# Altium PCB DIOT_Sampler_Adapter 20 mm spacing.PCBDOC
Units mm, origin at the board's own origin, x right, y up, seen from the top; angles counter-clockwise.
Board outline 35.9 x 100 mm, 4 copper layers (Top, GP1(GND), L3, Bot), stack 1.648 mm thick; 8 components, 21 nets, 58 pads, 0 vias.
Unrouted connection lines stored in the file: 14.
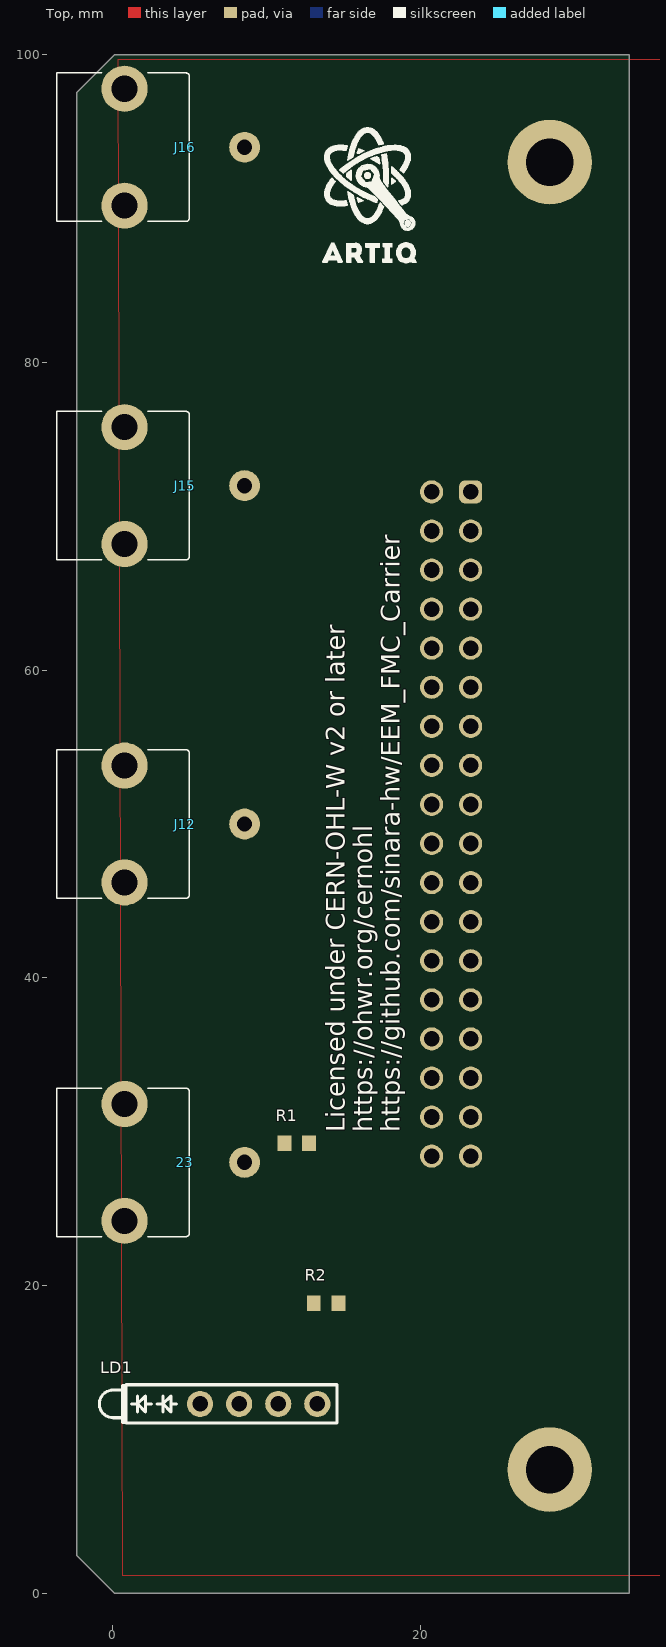
[diagram p0: Top view]
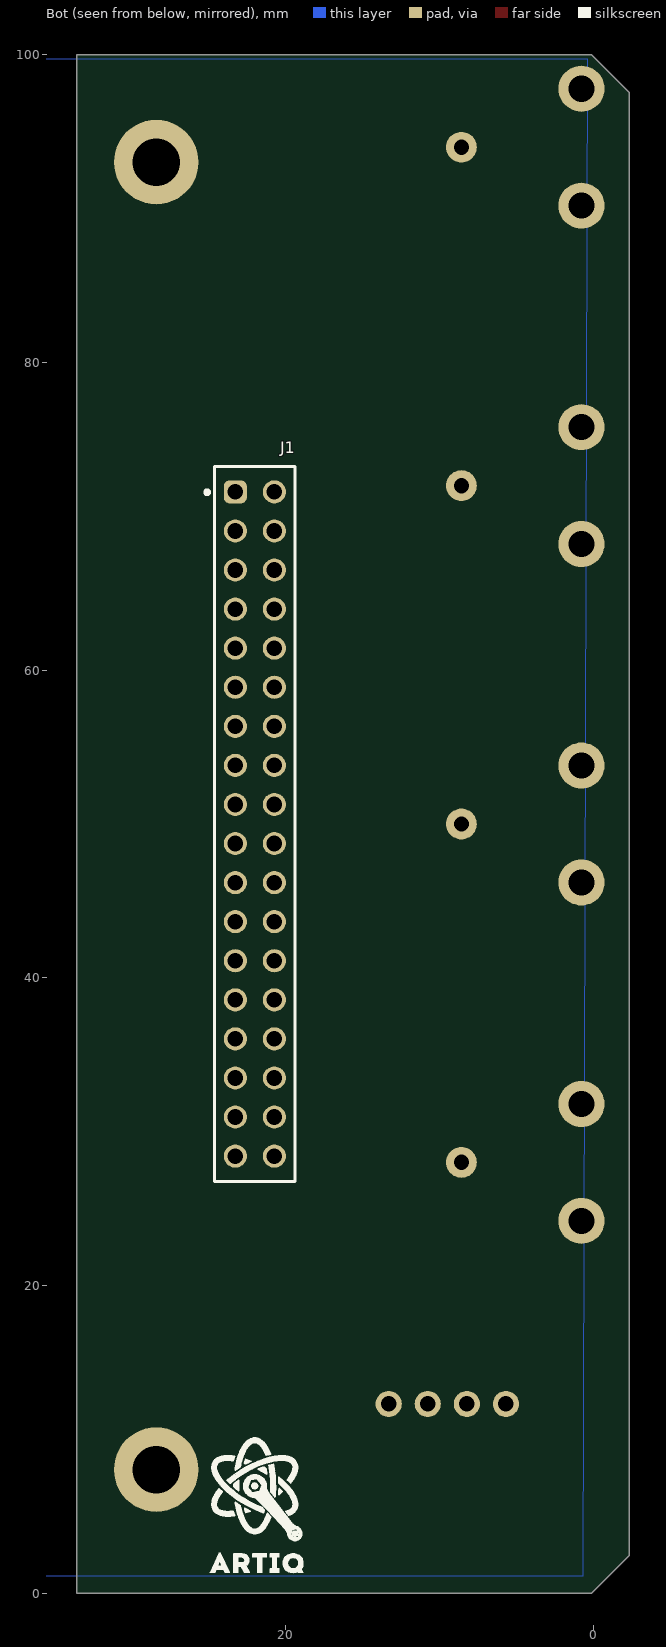
[diagram p1: Bot view, seen from below]
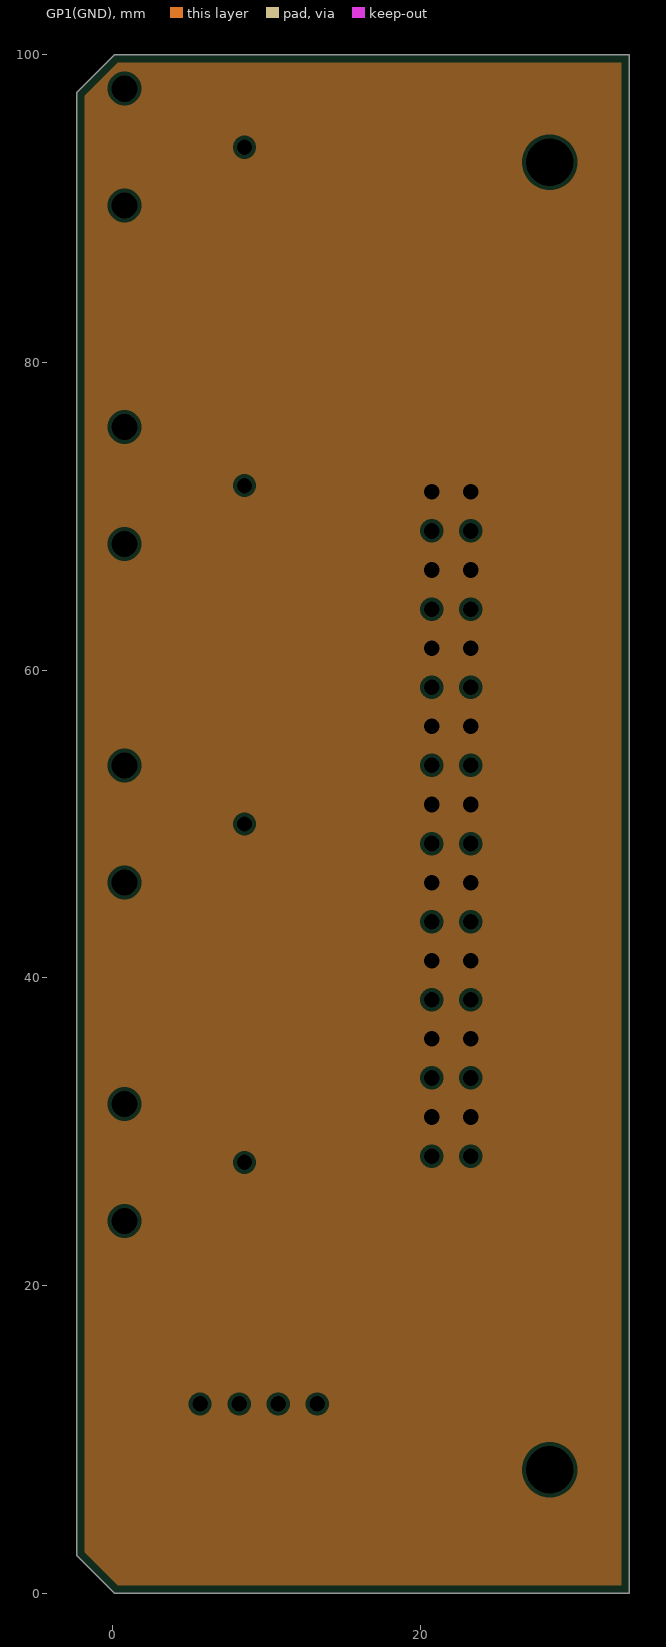
[diagram p2: GP1(GND), clearances drawn from the general rule]

## Layer stack, top to bottom
TopSolder: solder mask 0.0102, Solder Resist, Dk 3.5
Top: signal copper 0.058
Dielectric1: core 0.18, FR-4, Dk 4.8
GP1(GND): plane copper 0.036, net GND
Dielectric 3: prepreg 1.1, Dk 4.2
L3: signal copper 0.036
Dielectric2: core 0.18, FR-4, Dk 4.2
Bot: signal copper 0.058
BottomSolder: solder mask 0.0102, Solder Resist, Dk 3.5

## Board outline
0.101,0 -2.33,2.431 -2.33,97.569 0.101,100 33.57,100 33.57,0

## Design rules (kind name [scope] priority, off if disabled: settings)
AcuteAngle [All] p1: minimum=6.00000000000000E+0001 checktracksonly=FALSE
Clearance Clearance_DIFF [(InDifferentialPairClass('All Differential Pairs'))] p1: gap=0.127 ignorepadtopadclearanceinfootprint=FALSE except(0: Arc-Hole Track-Hole SMDPad-Hole THPad-Hole Via-Hole Fill-Hole Poly-Hole Region-Hole Text-Hole; 0.254: Arc-Poly Track-Poly SMDPad-Poly THPad-Poly Via-Poly Fill-Poly Poly-Poly Poly-Region Poly-Text)
Clearance [All] p2: gap=0.127 ignorepadtopadclearanceinfootprint=FALSE except(0: Arc-Hole Track-Hole SMDPad-Hole THPad-Hole Via-Hole Fill-Hole Poly-Hole Region-Hole Text-Hole; 0.203: Track-Poly; 0.381: Arc-Poly SMDPad-Poly THPad-Poly Via-Poly Fill-Poly Poly-Poly)
ComponentClearance [All] p1 off: gap=0.254 collisioncheckmode=3 verticalgap=0.254 showdistances=FALSE
DiffPairsRouting [All] p1: maxlimit=0.178 minlimit=0.152 mostfreqgap=0.152 toplayer_minwidth=0.127 toplayer_maxwidth=0.152 toplayer_prefwidth=0.152 midlayer1_minwidth=0.127 midlayer1_maxwidth=0.152 midlayer1_prefwidth=0.152 bottomlayer_minwidth=0.127 bottomlayer_maxwidth=0.152 bottomlayer_prefwidth=0.152 maxuncoupledlength=12.7
FabricationTestPointUsage TestPointUsage [All] p1: valid=0 allowmultiple=FALSE
FabricationTestpoint Testpoint [All] p1: side=3 testpointundercomponent=TRUE minsize=1.016 maxsize=2.54 preferedsize=1.524 minholesize=0.508 maxholesize=1.016 preferedholesize=0.813 testpointgrid=0.025 allowsidetop=TRUE allowsidebottom=TRUE usegrid=TRUE gridtolerance=0
Height [All] p1 off: minheight=0 maxheight=25.4 prefheight=12.7
HoleSize [All] p1: absolutevalues=TRUE maxlimit=3.81 minlimit=0.025 maxpercent=80.000 minpercent=20.000
HoleToHoleClearance [All] p1: gap=0.025 allowstackedmicrovias=TRUE
MinimumSolderMaskSliver [All] p1: minsoldermaskwidth=0
PlaneClearance [All] p1: clearance=0.254
PlaneConnect [All] p1: planeconnectstyle=Direct reliefexpansion=0.508 reliefentries=4 reliefconductorwidth=0.254 reliefairgap=0.254
PolygonConnect PolygonConnect_pad [(InPadClass('All Pads'))] p1: connectstyle=Relief reliefconductorwidth=0.254 reliefentries=4 polygonreliefangle="90 Angle" airgapwidth=0.254
PolygonConnect [All] p2: connectstyle=Direct reliefconductorwidth=0.254 reliefentries=4 polygonreliefangle="45 Angle" airgapwidth=0.254
RoutingVias [All] p1: holewidth=0.2 width=0.5 viastyle="Through Hole" minholewidth=0.2 minwidth=0.5 maxholewidth=0.711 maxwidth=1.27
SilkToSilkClearance [All] p1: silktosilkclearance=0
SilkToSolderMaskClearance SilkscreenOverComponentPads [IsPad] p1: minsilkscreentomaskgap=0 clearancetoexposedcopper=TRUE
SolderMaskExpansion [All] p1: expansion=0.051 istentingtop=FALSE
SupplyNets "Schematic Supply Nets_22" [InNet('P3V3_MP1')] p1: voltage=0.000
SupplyNets "Schematic Supply Nets_20" [InNet('P3V3')] p2: voltage=0.000
SupplyNets "Schematic Supply Nets_10" [InNet('GND')] p3: voltage=0.000
Width [All] p1: maxlimit=1.27 minlimit=0.127 preferedwidth=0.127
18 further rules are at their usual default settings.

## Components (designator, comment, footprint, x,y, rotation, side; value= is the part's Value field where it differs from the comment)
23 "BNC" MOLEX_73251-3150 8.57,28 r0 top locked (schematic designator J11)
J1 "61303621821" 61303621821 22,50 r270 bottom
J12 "BNC" MOLEX_73251-3150 8.57,50 r0 top
J15 "BNC" MOLEX_73251-3150 8.57,72 r0 top
J16 "BNC" MOLEX_73251-3150 8.57,94 r0 top
LD1 "Green/Green" LED_DIALIGHT_571-0122F 5.68,12.3 r0 top
R1 "220" RESC1608X55N 11.97,29.25 r0 top
R2 "220" RESC1608X55N 13.87,18.85 r0 top

## Footprints (in the part's own frame and the unit in brackets; to place one, negate y for a bottom-side part, rotate by r counter-clockwise, add the part's x,y. Pads: shape width x height; smd on the part's side, far side on the other; paste and mask are expansions set on the pad)
61303621821 [mm] "Socket Header, Pitch 2.54 mm, THT, Vertical, dual row, 36p"
  rrect50% 1.5x1.5 hole 1.02: 1(-21.59,-1.27)
  round 1.5 hole 1.02: 2(-21.59,1.27) 3(-19.05,-1.27) 4(-19.05,1.27) 5(-16.51,-1.27) 6(-16.51,1.27) 7(-13.97,-1.27) 8(-13.97,1.27) 9(-11.43,-1.27) 10(-11.43,1.27) 11(-8.89,-1.27) 12(-8.89,1.27) 13(-6.35,-1.27) 14(-6.35,1.27) 15(-3.81,-1.27) 16(-3.81,1.27) 17(-1.27,-1.27) 18(-1.27,1.27) 19(1.27,-1.27) 20(1.27,1.27) 21(3.81,-1.27) 22(3.81,1.27) 23(6.35,-1.27) 24(6.35,1.27) 25(8.89,-1.27) 26(8.89,1.27) 27(11.43,-1.27) 28(11.43,1.27) 29(13.97,-1.27) 30(13.97,1.27) 31(16.51,-1.27) 32(16.51,1.27) 33(19.05,-1.27) 34(19.05,1.27) 35(21.59,-1.27) 36(21.59,1.27)
  silkscreen extent -23.24,-3.22 23.24,2.62, body extent -23.11,-2.54 23.11,2.54, height 8.45
LED_DIALIGHT_571-0122F [mm] "2x 2mm LED (Top: Green, Bot: Green) PCB Edge Mounting (Without positioning pins) DIALIGHT 571 Serie"
  round 1.7 hole 1: 1(0,0) 2(2.54,0) 3(5.08,0) 4(7.62,0)
  silkscreen extent -6.55,-1.24 8.89,1.24, body extent -6.55,-1.24 8.89,1.24, height 8.61
MOLEX_73251-3150 [mm]
  round 2 hole 1: 1(0,0)
  round 3 hole 1.7: 2(-7.8,-3.8) 2(-7.8,3.8)
  silkscreen extent -12.2,-4.83 -3.6,4.83, body extent -25.4,-4.82 0.15,4.82, height 9.3
RESC1608X55N [mm] "Chip Resistor, EIA 0603, Metric 1608, Body 1.6x0.8mm, IPC Medium Density"
  rect 0.9x1 smd: 1(-0.8,0) 2(0.8,0)
  body extent -0.87,-0.47 0.88,0.48, height 0.55

## Part data
23 J12 J15 J16: library part MOLEX_73251-3150, Manufacturer=MOLEX, Manufacturer Part Number=73251-3150, Author="CERN DEM JLC", Component Type=Standard, CreateDate=19.09.2024, Family=BNC, HelpURL=\\cern.ch\dfs\Applications\Altium\Datasheets\MOLEX_73251-2121.pdf, LatestRevisionDate=19.09.2024, Mounted=Yes, Part Description="RF Connectors / Coaxial Connectors BNC RA PCB RECPT 50 OHM", Part Number=MOLEX_73251-3150, Pin Count=5, PressFit=No, Sense=No, SMD=No, Socket=No, Status=None
J1: "WR-PHD Socket Header, THT, Vertical, pitch 2.54mm, 2 Row, 36P", Contact Resistance=20mOhm, Manufacturer="Wurth Elektronik", Operating Temperature Max=125°C, Operating Temperature Min=-40°C, Rated Current=3A, Withstanding Voltage=500V, Working Voltage=250V, Category="Board-to-Board Connectors", ComponentLink1Description="Website Link", ComponentLink1URL=https://www.we-online.com/redexpert/article/61303621821?ad, ComponentLink2Description="Datasheet Link", ComponentLink2URL=https://www.we-online.com/redexpert/spec/61303621821?ad, Gender="Socket Header", Manufacturer Part Number=61303621821, Match Code=WR-PHD, Mount="Through Hole", Number of Pins=36, Number of Rows=2, Orientation=Vertical, Packaging=Tray, Pitch=2.54mm
LD1: library part LED_DIALIGHT_571-0122F, "LED x2 Green 1C2A-BOT_3C4A-TOP", Manufacturer=DIALIGHT, Manufacturer Part Number=571-0122F, Author="CERN DEM JLC", Bonding=No, Color=Green/Green, Component Type=Standard, ComponentHeight=8.6mm, CreateDate=09.11.2009, HelpURL=\\cern.ch\dfs\Applications\Altium\Datasheets\LED_DIALIGHT_571-0122F.pdf, LatestRevisionDate=17.03.2010, Mounted=Yes, PackageDescription="2x 2mm Red LED PCB Edge Mounting (Without positioning pins) DIALIGHT 571 Serie", Part Description="Dual 2mm Green LEDs CBI® Circuit Board Indicator (Without positioning pins)", Part Number=LED_DIALIGHT_571-0122F, Pin Count=4, PressFit=No, Sense=No, SMD=No, Socket=No
R1 R2: library part R0603_220R_1%_0.1W_100PPM, "Resistor - 1%", Case=0603, Manufacturer=GENERIC, Manufacturer1 ComponentHeight=0.55mm, Manufacturer1 Example="NIC COMPONENT", Manufacturer1 Part Number=NRC06F2200TRF, Power=0.1W, Tolerance=±1%, Author="CERN DEM JLC", Component Type=Standard, CreateDate=03.12.2007, HelpURL=\\cern.ch\dfs\Applications\Altium\Datasheets\R0603_NIC_NRC.pdf, LatestRevisionDate=13.03.2008, Manufacturer Part Number=R0603_220R_1%_0.1W_100PPM, Mounted=Yes, Part Description="General Purpose Thick Film Chip Resistor", Part Number=R0603_220R_1%_0.1W_100PPM, Pin Count=2, Sense=No, SMD=Yes, Socket=No, Status=Preferred, TC=±100ppm/°C

## Free pads (board coordinates)
  round 5.5 hole 3.1: MH(28.414,8.03) MH(28.414,93.03)

## Nets (pads, with @x,y where several pads share a name; then routed paths per layer and width w, separated by ;. In a path a pad name is that pad's centre, name@x,y a point inside that pad or via, vN(x,y) a via of type N, cw(c..) or ccw(c..) an arc to the next point about the centre after c; other vN are vias at no path point)
ADC_IN_N0: J1.32
ADC_IN_N1: 23.2 J1.28
ADC_IN_N2: J1.24
ADC_IN_N3: J1.20 J12.2
ADC_IN_N4: J1.16
ADC_IN_N5: J1.12 J15.2
ADC_IN_N6: J1.8
ADC_IN_N7: J1.4 J16.2
ADC_IN_P0: J1.31
ADC_IN_P1: 23.1 J1.27
ADC_IN_P2: J1.23
ADC_IN_P3: J1.19 J12.1
ADC_IN_P4: J1.15
ADC_IN_P5: J1.11 J15.1
ADC_IN_P6: J1.7
ADC_IN_P7: J1.3 J16.1
GND: J1.1 J1.2 J1.5 J1.6 J1.9 J1.10 J1.13 J1.14 J1.17 J1.18 J1.21 J1.22 J1.25 J1.26 J1.29 J1.30 J1.33 J1.34 R1.2 R2.2
NetLD1_1: LD1.1 R2.1
NetLD1_3: LD1.3 R1.1
P3V3: LD1.2
P3V3_MP1: LD1.4
pads on no net: J1.35 J1.36

## Polygon pours and split planes (outlines as drawn)
no net on Top "ML1_BAL" (solid, shelved, pour order 26): 0.344,99.73 159.464,99.73 159.464,1.13 0.638,1.13
no net on Bot "ML1_BAL" (solid, shelved, pour order 24): 0.344,99.73 159.464,99.73 159.464,1.13 0.638,1.13
GND on GP1(GND) (split plane): 33.06,99.49 33.06,0.51 0.312,0.51 -1.82,2.642 -1.82,97.358 0.312,99.49

## Keep-outs
KeepOutLayer:
  drawing of 3462 lines, arcs and shapes, not listed

## Silkscreen, mask and mechanical layers (free items; w line width, h text height)
TopOverlay:
  drawing of 1237 lines, arcs and shapes, not listed
  text "Licensed under CERN-OHL-W v2 or later / https://ohwr.org/cernohl / https://github.com/sinara-hw/EEM_FMC_Carrier" at 18.671,29.977 h1.2 r90
BottomOverlay:
  drawing of 1237 lines, arcs and shapes, not listed
M1 Board Shape:
  drawing of 304 lines, arcs and shapes, not listed
  text "Layer" at 8.908,138.136 h1.52
  text "Name" at 19.319,138.136 h1.52
  text "Material" at 41.411,138.136 h1.52
  text "Thickness" at 63.249,138.136 h1.52
  text "Constant" at 79.755,138.136 h1.52
  text "Board Layer Stack" at 94.23,138.136 h1.52
  text "TopOverlay" at 19.319,135.088 h1.52
  text "TopSolder" at 19.319,132.04 h1.52
  text "Solder Resist" at 41.411,132.04 h1.52
  text "0,40mil" at 63.249,132.04 h1.52
  text "3.5" at 79.755,132.04 h1.52
  text "1" at 8.908,128.992 h1.52
  text "Top" at 19.319,128.992 h1.52
  text "2,28mil" at 63.249,128.992 h1.52
  text "Dielectric1" at 19.319,125.944 h1.52
  text "FR-4" at 41.411,125.944 h1.52
  text "7,09mil" at 63.249,125.944 h1.52
  text "4.8" at 79.755,125.944 h1.52
  text "2" at 8.908,122.896 h1.52
  text "GP1(GND)" at 19.319,122.896 h1.52
  text "1,42mil" at 63.249,122.896 h1.52
  text "Dielectric 3" at 19.319,119.848 h1.52
  text "43,31mil" at 63.249,119.848 h1.52
  text "4.2" at 79.755,119.848 h1.52
  text "3" at 8.908,116.8 h1.52
  text "L3" at 19.319,116.8 h1.52
  text "1,42mil" at 63.249,116.8 h1.52
  text "Dielectric2" at 19.319,113.752 h1.52
  text "FR-4" at 41.411,113.752 h1.52
  text "7,09mil" at 63.249,113.752 h1.52
  text "4.2" at 79.755,113.752 h1.52
  text "4" at 8.908,110.704 h1.52
  text "Bot" at 19.319,110.704 h1.52
  text "2,28mil" at 63.249,110.704 h1.52
  text "BottomSolder" at 19.319,107.656 h1.52
  text "Solder Resist" at 41.411,107.656 h1.52
  text "0,40mil" at 63.249,107.656 h1.52
  text "3.5" at 79.755,107.656 h1.52
  text "BottomOverlay" at 19.319,104.608 h1.52
  text "All vias must be fileld with resin and capped with copper" at 33.524,84.604 h3
M2 Old Board Shape:
  lines w0.1: -2.544,-14.238 -2.544,108.444
Mechanical4:
  lines w1: 31.014,5.43 31.014,95.43 106.014,95.43 106.014,5.43 31.014,5.43 ; 117.014,59.43 117.014,94.43 157.014,94.43 157.014,59.43 117.014,59.43
Top Component Outline:
  the board outline again, w0.1
Mechanical13:
  lines w0.01: -2.782,-0.784 -2.782,80.924

## Text inside footprints (layer, text, board x,y; h text height)
23: Mechanical14 "Board Edge" at -3.904,25.692 h1 r90
J12: Mechanical14 "Board Edge" at -3.904,47.692 h1 r90
J15: Mechanical14 "Board Edge" at -3.904,69.692 h1 r90
J16: Mechanical14 "Board Edge" at -3.904,91.692 h1 r90